# Altium PCB PCB_7Seg.PcbDoc
Units mm, origin at the board's own origin, x right, y up, seen from the top; angles counter-clockwise.
Board outline 13.21 x 23.88 mm, 2 copper layers (Top Layer, Bottom Layer); 9 components, 25 nets, 18 pads, 0 vias.
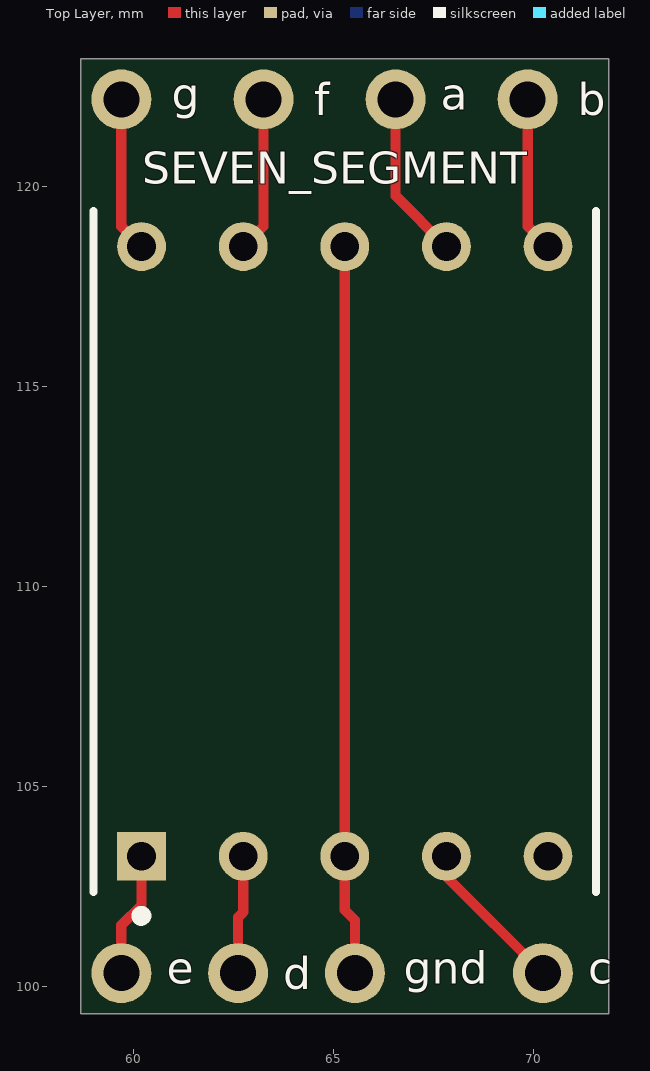
[diagram p0: Top Layer view]
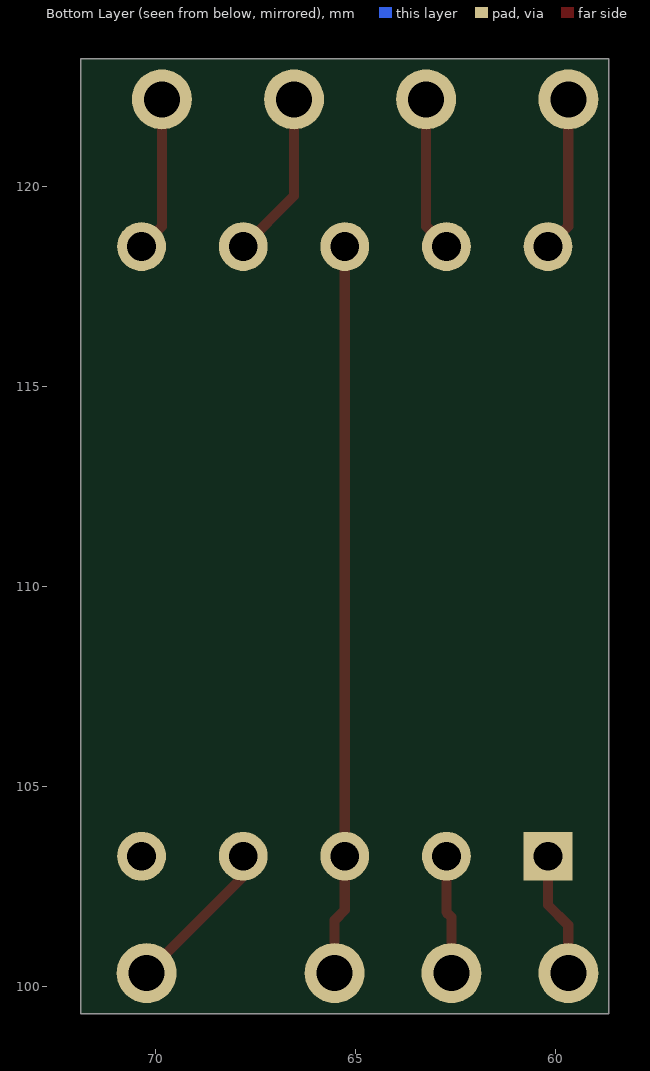
[diagram p1: Bottom Layer view, seen from below]

## Layer stack, top to bottom
Top Solder: solder mask 0.0102, Solder Resist, Dk 3.5
Top Layer: signal copper 0.0356
Dielectric 1: dielectric 0.32, FR-4, Dk 4.8
Bottom Layer: signal copper 0.0356
Bottom Solder: solder mask 0.0102, Solder Resist, Dk 3.5

## Board outline
58.674,99.314 58.674,123.19 71.882,123.19 71.882,99.314

## Design rules (kind name [scope] priority, off if disabled: settings)
Clearance [All] p1: gap=0.254 ignorepadtopadclearanceinfootprint=FALSE except(0: Arc-Hole Track-Hole SMDPad-Hole THPad-Hole Via-Hole Fill-Hole Poly-Hole Region-Hole Text-Hole)
PolygonConnect [All] p1: connectstyle=Relief reliefconductorwidth=0.254 reliefentries=4 polygonreliefangle="90 Angle" airgapwidth=0.254
RoutingVias [All] p1: holewidth=0.711 width=1.27 viastyle="Through Hole" minholewidth=0.711 minwidth=1.27 maxholewidth=0.711 maxwidth=1.27
SolderMaskExpansion [All] p1: expansion=0.102 istentingtop=FALSE
Width [All] p1: maxlimit=0.254 minlimit=0.254 preferedwidth=0.254
30 further rules are at their usual default settings.

## Classes and differential pairs
component class SCH_main: SPDT1

## Components (designator, comment, footprint, x,y, rotation, side; value= is the part's Value field where it differs from the comment)
a "Battery Pad" "BATTERY PAD" 66.548,122.174 r90 top (schematic designator bp17)
b "Battery Pad" "BATTERY PAD" 69.85,122.174 r90 top (schematic designator bp18)
c "Battery Pad" "BATTERY PAD" 70.231,100.33 r90 top (schematic designator bp19)
d "Battery Pad" "BATTERY PAD" 62.611,100.33 r90 top (schematic designator bp21)
e "Battery Pad" "BATTERY PAD" 59.69,100.33 r90 top (schematic designator bp22)
f "Battery Pad" "BATTERY PAD" 63.246,122.174 r90 top (schematic designator bp16)
g "Battery Pad" "BATTERY PAD" 59.69,122.174 r90 top (schematic designator bp15)
gnd "Battery Pad" "BATTERY PAD" 65.532,100.33 r90 top (schematic designator bp20)
SEVEN_SEGMENT "CC_SEVEN_SEGMENT" 7SEG-AVAGO-BROADCAM_HDSP-5551_0 65.278,110.871 r0 top (schematic designator SEVEN_SEGMENT2)

## Footprints (in the part's own frame and the unit in brackets; to place one, negate y for a bottom-side part, rotate by r counter-clockwise, add the part's x,y. Pads: shape width x height; smd on the part's side, far side on the other; paste and mask are expansions set on the pad)
7SEG-AVAGO-BROADCAM_HDSP-5551_0 [mm]
  rect 1.22x1.22 hole 0.72 paste-1000 mask+0: 1(-5.08,-7.62)
  round 1.22 hole 0.72 paste-1000 mask+0: 2(-2.54,-7.62) 3(0,-7.62) 4(2.54,-7.62) 5(5.08,-7.62) 6(-5.08,7.62) 7(-2.54,7.62) 8(0,7.62) 9(2.54,7.62) 10(5.08,7.62)
  silkscreen extent -6.29,-9.23 6.28,8.51, body extent -6.15,-9.5 6.15,9.5, height 8.5
"BATTERY PAD" [mm]
  round 1.5 hole 0.9 unplated: 1(0,0)

## Nets (pads, with @x,y where several pads share a name; then routed paths per layer and width w, separated by ;. In a path a pad name is that pad's centre, name@x,y a point inside that pad or via, vN(x,y) a via of type N, cw(c..) or ccw(c..) an arc to the next point about the centre after c; other vN are vias at no path point)
+5: 
+sch: 
-sch: 
a: 
b: 
B+: 
c: 
d: 
e: 
f: 
g: 
GND: gnd.1 SEVEN_SEGMENT.3 SEVEN_SEGMENT.8 | length 18.3
  Top Layer w0.254: SEVEN_SEGMENT.8 SEVEN_SEGMENT.3 65.278,101.905 65.532,101.651 gnd.1
ina: 
inb: 
Netbp15_1: g.1 SEVEN_SEGMENT.6 | length 3.9
  Top Layer w0.254: g.1 59.69,118.999 SEVEN_SEGMENT.6
Netbp16_1: f.1 SEVEN_SEGMENT.7 | length 3.9
  Top Layer w0.254: SEVEN_SEGMENT.7 63.246,118.999 f.1
Netbp17_1: a.1 SEVEN_SEGMENT.9 | length 4.2
  Top Layer w0.254: a.1 66.548,119.761 SEVEN_SEGMENT.9
Netbp18_1: b.1 SEVEN_SEGMENT.10 | length 3.9
  Top Layer w0.254: b.1 69.85,118.999 SEVEN_SEGMENT.10
Netbp19_1: c.1 SEVEN_SEGMENT.4 | length 3.9
  Top Layer w0.254: SEVEN_SEGMENT.4 67.818,102.743 c.1
Netbp21_1: d.1 SEVEN_SEGMENT.2 | length 3
  Top Layer w0.254: d.1 62.611,101.727 62.738,101.854 SEVEN_SEGMENT.2
Netbp22_1: e.1 SEVEN_SEGMENT.1 | length 3.1
  Top Layer w0.254: e.1 59.69,101.524 60.198,102.032 SEVEN_SEGMENT.1
Netbp23_1: 
Netbp25_1: 
NetIC2_20: 
VCC: 
pads on no net: SEVEN_SEGMENT.5